# Altium PCB PCB1.PcbDoc
Units mil, origin at the board's own origin, x right, y up, seen from the top; angles counter-clockwise.
Board outline 2007.87 x 2755.91 mil, 2 copper layers (Top Layer, Bottom Layer); 46 components, 53 nets, 181 pads, 12 vias.
Unrouted connection lines stored in the file: 4.
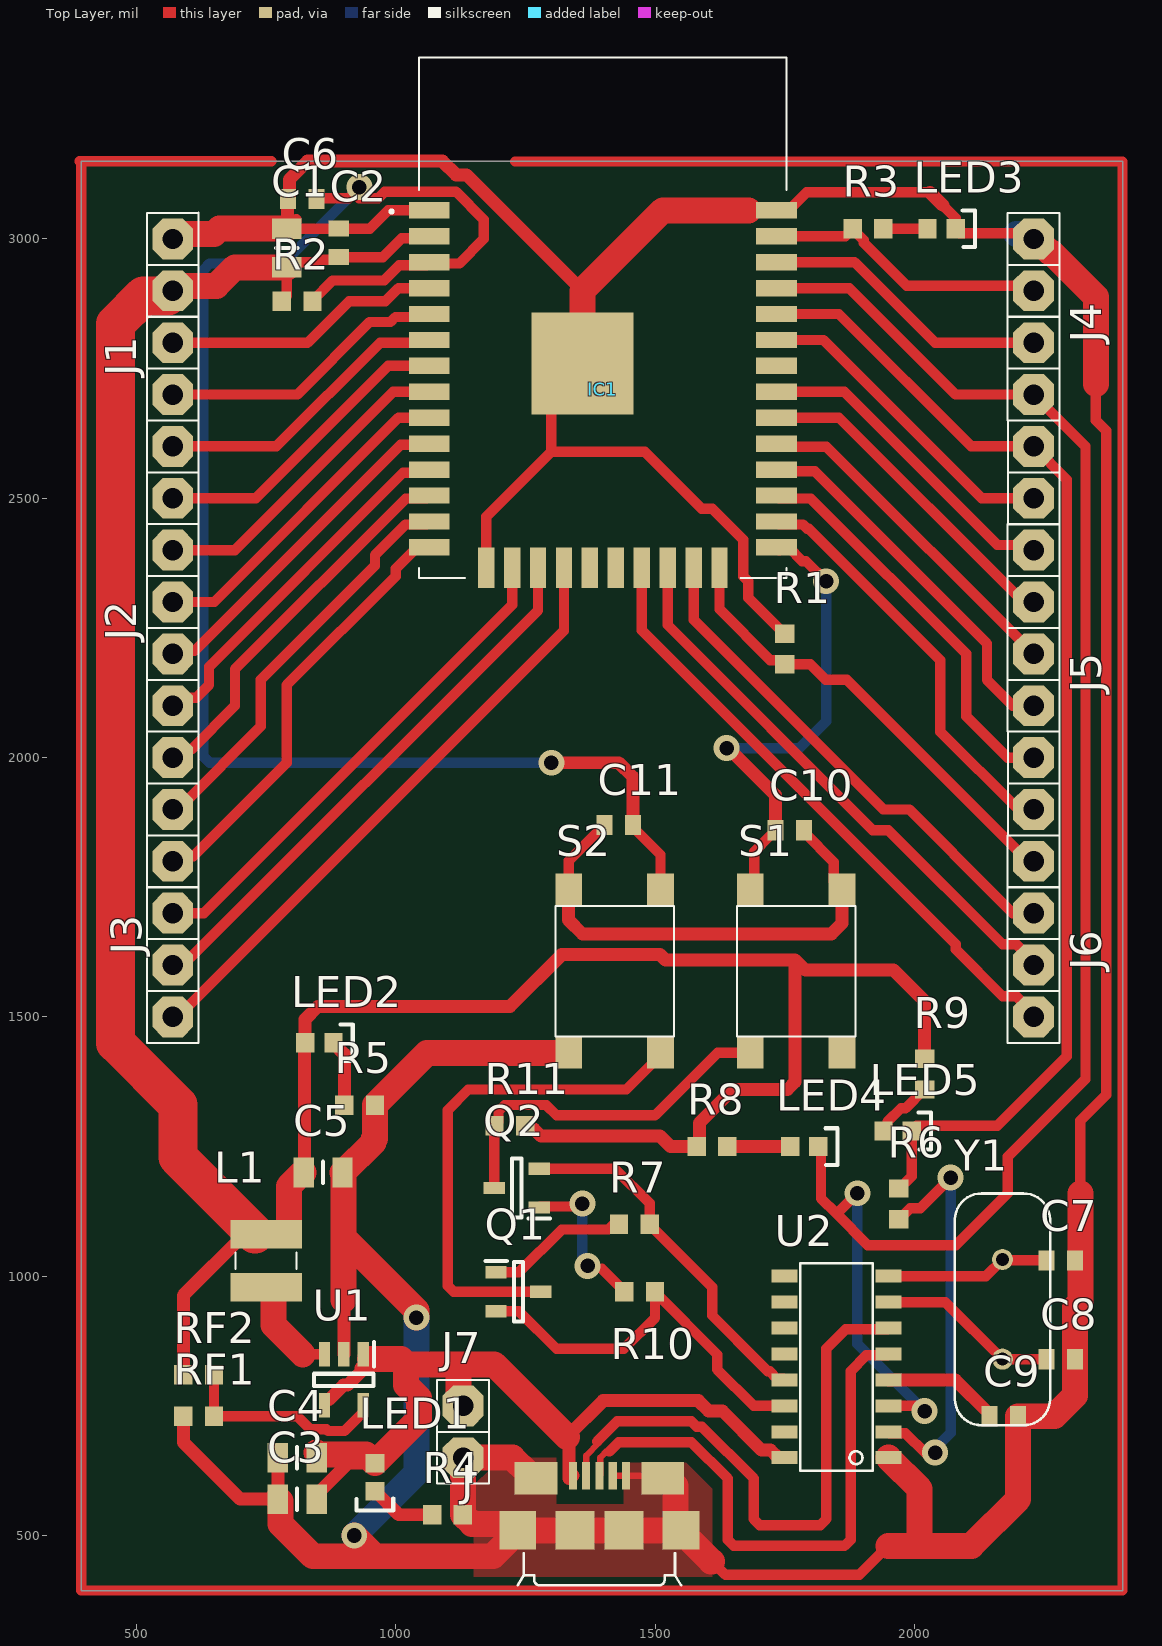
[diagram p0: Top Layer view]
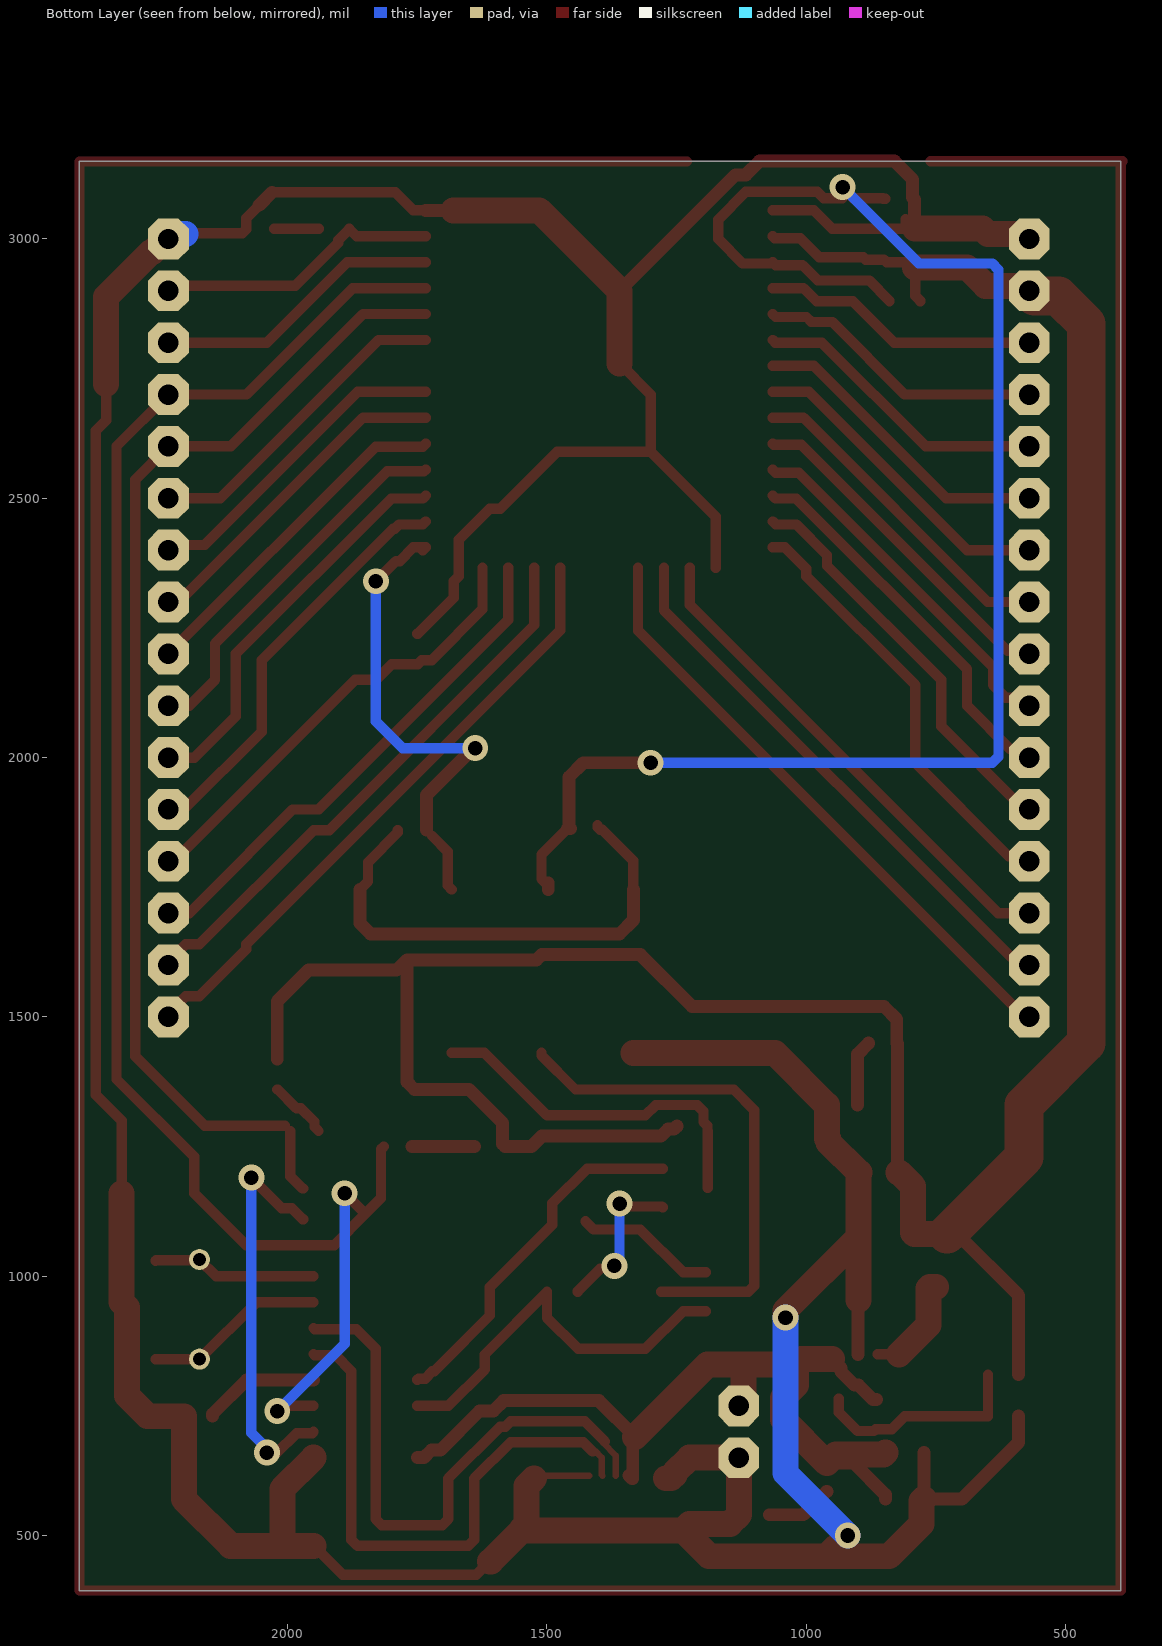
[diagram p1: Bottom Layer view, seen from below]
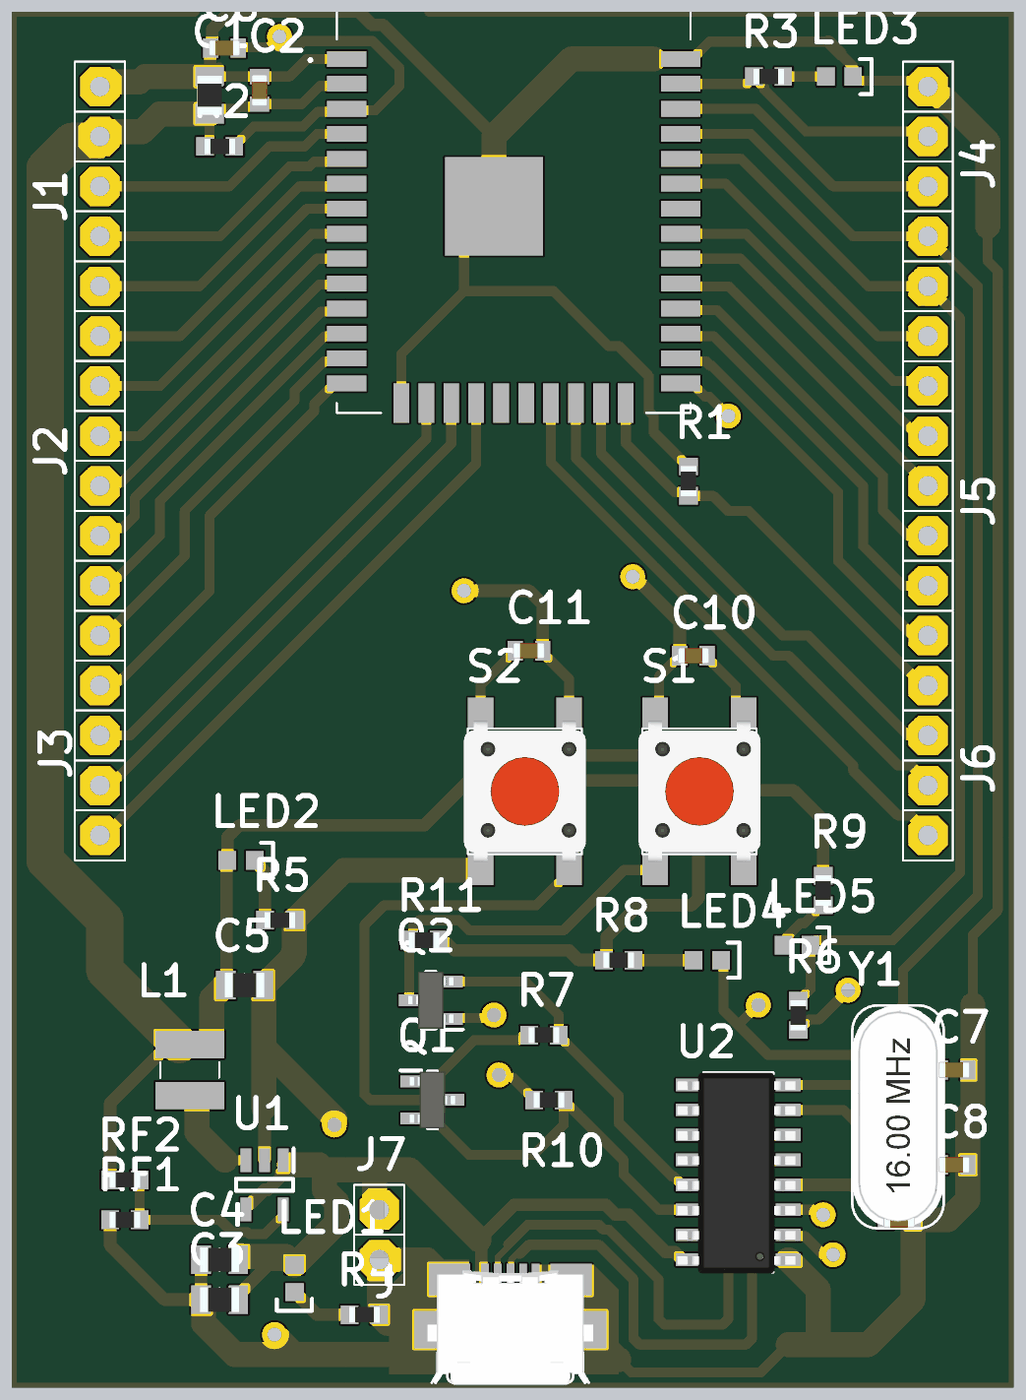
[diagram p2: 3D render of the assembled board from above, using the file's embedded part models]

## Layer stack, top to bottom
Top Solder: solder mask 0.4, Solder Resist, Dk 3.5
Top Layer: signal copper 1.4
Dielectric 1: dielectric 12.6, FR-4, Dk 4.8
Bottom Layer: signal copper 1.4
Bottom Solder: solder mask 0.4, Solder Resist, Dk 3.5

## Board outline
393.7,393.7 393.7,3149.61 2401.57,3149.61 2401.57,393.7

## Design rules (kind name [scope] priority, off if disabled: settings)
AssemblyTestPointUsage [All] p1 off:
AssemblyTestpoint [All] p1 off: testpointundercomponent=TRUE minsize=40 maxsize=100 preferedsize=60 minholesize=0 maxholesize=40 preferedholesize=32 testpointgrid=1 usegrid=TRUE gridtolerance=0.01 allowsidetop=TRUE allowsidebottom=TRUE
Clearance [All] p1: gap=10 ignorepadtopadclearanceinfootprint=FALSE except(0: Arc-Hole Track-Hole SMDPad-Hole THPad-Hole Via-Hole Fill-Hole Poly-Hole Region-Hole Text-Hole)
ComponentClearance [All] p1 off: gap=10 collisioncheckmode=3 verticalgap=10 showdistances=FALSE
DiffPairsRouting [All] p1 off: maxlimit=10 minlimit=10 mostfreqgap=10 toplayer_minwidth=15 toplayer_maxwidth=15 toplayer_prefwidth=15 bottomlayer_minwidth=15 bottomlayer_maxwidth=15 bottomlayer_prefwidth=15 maxuncoupledlength=500
FabricationTestPointUsage [All] p1 off: valid=0 allowmultiple=FALSE
FabricationTestpoint [All] p1 off: side=3 testpointundercomponent=TRUE minsize=40 maxsize=100 preferedsize=60 minholesize=0 maxholesize=40 preferedholesize=32 testpointgrid=1 allowsidetop=TRUE allowsidebottom=TRUE usegrid=TRUE gridtolerance=0.01
FanoutControl Fanout_BGA [IsBGA] p1 off: bgadir=Out bgaviamode=Centered fanoutstyle=Auto fanoutdirection=Alternating viagrid=1 // Fanout_BGA (Default Rule)
FanoutControl Fanout_LCC [IsLCC] p2 off: bgadir=Out bgaviamode=Centered fanoutstyle=Auto fanoutdirection=Alternating viagrid=1 // Fanout_LCC (Default Rule)
FanoutControl Fanout_SOIC [IsSOIC] p3 off: bgadir=Out bgaviamode=Centered fanoutstyle=Auto fanoutdirection=Alternating viagrid=1 // Fanout_SOIC (Default Rule)
FanoutControl Fanout_Small [(CompPinCount < 5)] p4 off: bgadir=Out bgaviamode=Centered fanoutstyle=Auto fanoutdirection=OutThenIn viagrid=1 // Fanout_Small (Default Rule)
FanoutControl Fanout_Default [All] p5 off: bgadir=Out bgaviamode=Centered fanoutstyle=Auto fanoutdirection=Alternating viagrid=1 // Fanout_Default (Default Rule)
Height [All] p1 off: minheight=0 maxheight=1000 prefheight=500
HoleSize [All] p1 off: absolutevalues=TRUE maxlimit=100 minlimit=1 maxpercent=80.000 minpercent=20.000
HoleToHoleClearance [All] p1 off: gap=10 allowstackedmicrovias=TRUE
LayerPairs [All] p1 off: enforce=TRUE
MinimumSolderMaskSliver [All] p1 off: minsoldermaskwidth=10
NetAntennae [All] p1 off: netantennaetolerance=0
PasteMaskExpansion [All] p1 off: expansion=0
PlaneClearance [All] p1 off: clearance=20
PlaneConnect [All] p1 off: planeconnectstyle=Relief reliefexpansion=20 reliefentries=4 reliefconductorwidth=10 reliefairgap=10
PolygonConnect [All] p1 off: connectstyle=Relief reliefconductorwidth=10 reliefentries=4 polygonreliefangle="90 Angle" airgapwidth=10
RoutingCorners [All] p1 off: cornerstyle=45-Degree minsetback=100 maxsetback=100
RoutingLayers [All] p1 off: top layer_v5=TRUE bottom layer_v5=TRUE
RoutingPriority [All] p1 off: routingpriority=0
RoutingTopology [All] p1 off: topology=Shortest
RoutingVias [All] p1 off: holewidth=28 width=50 viastyle="Through Hole" minholewidth=28 minwidth=50 maxholewidth=28 maxwidth=50
ShortCircuit [All] p1 off: allowed=FALSE
SilkToSilkClearance [All] p1 off: silktosilkclearance=10
SilkToSolderMaskClearance [IsPad] p1 off: minsilkscreentomaskgap=10 clearancetoexposedcopper=TRUE
SolderMaskExpansion [All] p1 off: expansion=4 istentingtop=FALSE
UnRoutedNet [All] p1 off:
UnpouredPolygon [All] p1 off:
Width [All] p1 off: maxlimit=10 minlimit=10 preferedwidth=10
1 further rules are at their usual default settings.

## Classes and differential pairs
differential pair USB: +USB_P -USB_N

## Components (designator, comment, footprint, x,y, rotation, side; value= is the part's Value field where it differs from the comment)
C1 "1uF" "0805 Capacitor" 790,2982.6 r90 top
C2 "0.1uF" "0603 Capacitor" 890,2992.44 r270 top
C3 "4.7uF" "0805 Capacitor" 810,570 r0 top
C4 "4.7uF" "0805 Capacitor" 810,650 r0 top
C5 "10uF" "0805 Capacitor" 860,1200 r180 top
C6 "1uF" "0603 Capacitor" 819.76,3077.32 r180 top
C7 "22pF" "0603 Capacitor" 2282.44,1030 r0 top
C8 "22pF" "0603 Capacitor" 2282.44,840 r180 top
C9 "0.1uF" "0603 Capacitor" 2172.44,730 r0 top
C10 "0.1uF" "0603 Capacitor" 1760,1860 r0 top
C11 "0.1uF" "0603 Capacitor" 1430,1870 r0 top
IC1 "ESP32" ESP32 1399.37,2848.19 r0 top
J "MicroUSB" MicroUSB 1392.76,510 r0 top
J1 "JumperHDR6" JumperHDR6 570,2500 r90 top
J2 "JumperHDR6" JumperHDR6 570,1900 r90 top
J3 "JumperHDR4" JumperHDR4 570,1500 r90 top
J4 "JumperHDR6" JumperHDR6 2230,3000 r270 top
J5 "JumperHDR6" JumperHDR6 2230,2400 r270 top
J6 "JumperHDR4" JumperHDR4 2230,1800 r270 top
J7 "JumperHDR_ALT" JumperHDR 1130,650 r90 top
L1 "2.2uH" INDUCTOR_3x3.5 750,1030 r90 top
LED1 "5V_OK" "0603 LED" 960,610 r90 top
LED2 "3V3_OK" "0603 LED" 855,1450 r180 top
LED3 "USER" "0603 LED" 2055,3020 r180 top
LED4 "TX" "0603 LED" 1790,1250 r180 top
LED5 "RX" "0603 LED" 1970,1280 r180 top
Q1 "BC817-25" BC817 1236.69,970 r0 top
Q2 "BC817-25" BC817 1233.31,1170 r180 top
R1 "4.7K" "0603 Resistor" 1750,2209.53 r90 top
R2 "10K" "0603 Resistor" 810,2880 r180 top
R3 "0.47K" "0603 Resistor" 1910.47,3020 r180 top
R4 "1K" "0603 Resistor" 1100,540 r0 top
R5 "1K" "0603 Resistor" 930.47,1330 r0 top
R6 "0.47K" "0603 Resistor" 1970,1139.53 r90 top
R7 "10K" "0603 Resistor" 1460,1100 r180 top
R8 "0.47K" "0603 Resistor" 1610,1250 r180 top
R9 "0.47K" "0603 Resistor" 2020,1389.53 r90 top
R10 "10K" "0603 Resistor" 1470.47,970 r180 top
R11 "4.7K" "0603 Resistor" 1220,1290 r180 top
RF1 "2.2K" "0603 Resistor" 620,730 r0 top
RF2 "10K" "0603 Resistor" 620,810 r180 top
S1 "PGM" "TACT SWITCH SMD" 1770,1590 r270 top
S2 "RESET" "TACT SWITCH SMD" 1420,1590 r270 top
U1 "AP3417BK-ADJTRG1" "SOT BUCK" 900,800 r270 top
U2 "CH340" ch340g-SOIC16 1850,800 r180 top
Y1 "HC49 Crystal" Crystal-HC49 2170,936.06 r90 top value=12MHz

## Footprints (in the part's own frame and the unit in brackets; to place one, negate y for a bottom-side part, rotate by r counter-clockwise, add the part's x,y. Pads: shape width x height; smd on the part's side, far side on the other; paste and mask are expansions set on the pad)
"0603 Capacitor" [mm]
  rect 0.78x0.99 smd: 1(-0.7,0) 2(0.7,0)
  body extent -0.8,-0.41 0.8,0.41, height 0.9
"0603 LED" [mm]
  rect 0.9x0.95 smd: 1(-0.635,0) 2(0.75,0)
  silkscreen extent -1.58,-0.9 -0.97,0.9
"0603 Resistor" [mm]
  rect 0.9x0.95 smd: 1(-0.75,0) 2(0.75,0)
  body extent -0.77,-0.4 0.77,0.4, height 0.55
"0805 Capacitor" [mm]
  rect 1x1.45 smd: 1(-0.95,0) 2(0.95,0)
  silkscreen extent 0,-0.53 0,0.53, body extent -1,-0.63 1,0.63, height 0.65
BC817 [mm]
  rect 1.05x0.6 smd: 1(-1.1,0.95) 2(-1.1,-0.95) 3(1.1,0)
  silkscreen extent -1.63,-1.45 0.23,1.5, body extent -1.15,-1.45 1.15,1.45, height 1.1
ch340g-SOIC16 [mil]
  rect 50x25 smd: 1(-100,150) 2(-100,100) 3(-100,50) 4(-100,0) 5(-100,-50) 6(-100,-100) 7(-100,-150) 8(-100,-200) 9(100,-200) 10(100,-150) 11(100,-100) 12(100,-50) 13(100,0) 14(100,50) 15(100,100) 16(100,150)
  silkscreen extent -70,-225 70,175, body extent -114,-224 122,177, height 67
Crystal-HC49 [mm]
  round 1.03 hole 0.63: 1(-2.44,0) 2(2.44,0)
  silkscreen extent -5.68,-2.33 5.68,2.33, body extent -5.67,-2.33 5.67,2.32, height 1.49
ESP32 [mm]
  rect 2x0.8 smd: 1(-8.5,5.26) 2(-8.5,3.99) 3(-8.5,2.72) 4(-8.5,1.45) 5(-8.5,0.18) 6(-8.5,-1.09) 7(-8.5,-2.36) 8(-8.5,-3.63) 9(-8.5,-4.9) 10(-8.5,-6.17) 11(-8.5,-7.44) 12(-8.5,-8.71) 13(-8.5,-9.98) 14(-8.5,-11.25) 25(8.5,-11.25) 26(8.5,-9.98) 27(8.5,-8.71) 28(8.5,-7.44) 29(8.5,-6.17) 30(8.5,-4.9) 31(8.5,-3.63) 32(8.5,-2.36) 33(8.5,-1.09) 34(8.5,0.18) 35(8.5,1.45) 36(8.5,2.72) 37(8.5,3.99) 38(8.5,5.26)
  rect 0.8x2 smd: 15(-5.715,-12.25) 16(-4.445,-12.25) 17(-3.175,-12.25) 18(-1.905,-12.25) 19(-0.635,-12.25) 20(0.635,-12.25) 21(1.905,-12.25) 22(3.175,-12.25) 23(4.445,-12.25) 24(5.715,-12.25)
  rect 5x5 smd: 39(-1,-2.24)
  silkscreen extent -10.4,-12.75 9,12.75, body extent -9,-12.75 9,12.75, height 3.1
INDUCTOR_3x3.5 [mm]
  rect 1.4x3.5 smd: 1(-1.3,0) 2(1.3,0)
  silkscreen extent -0.4,-1.5 0.4,1.5
JumperHDR [mm]
  oct 2x2 hole 1: 1(0,0) 2(2.54,0)
  silkscreen extent -1.27,-1.27 3.81,1.27
JumperHDR4 [mm]
  oct 2x2 hole 1: 1(0,0) 2(2.54,0) 3(5.08,0) 4(7.62,0)
  silkscreen extent -1.27,-1.27 8.89,1.27
JumperHDR6 [mm]
  oct 2x2 hole 1: 1(0,0) 2(2.54,0) 3(5.08,0) 4(7.62,0) 5(10.16,0) 6(12.7,0)
  silkscreen extent -1.27,-1.27 13.99,1.27
MicroUSB [mm]
  rect 0.4x1.35 smd: 1(-1.3,2.675) 2(-0.65,2.675) 3(0,2.675) 4(0.65,2.675) 5(1.3,2.675)
  rect 1.8x1.9 smd: 5(-4,0) 5(4,0)
  rect 2.1x1.6 smd: 5(-3.1,2.55) 5(3.1,2.55)
  rect 1.9x1.9 smd: 5(-1.2,0) 5(1.2,0)
  silkscreen extent -4,-2.7 4,-1.13, body extent -4.32,-2.8 4.33,3.1, height 2.76
"SOT BUCK" [mm]
  rect 1.2x0.55 smd: 1(-1.25,0.95) 2(-1.25,0) 3(-1.25,-0.95) 4(1.25,-0.95) 5(1.25,0.95)
  silkscreen extent -1.85,-1.46 0.3,1.48, body extent -1.41,-1.46 1.41,1.46, height 1.45
"TACT SWITCH SMD" [mm]
  rect 1.55x1.3 smd: 1(-3.95,2.3) 1(4.05,2.3) 2(-3.95,-2.2) 2(4.05,-2.2)
  silkscreen extent -3.15,-2.85 3.25,2.95, body extent -3.9,-3.05 4,3.15, height 7

## Part data
C1 C3 C4 C5: library part "0805 Capacitor", "Capacitor", Manufacturer_Name=TDK, Manufacturer_Part_Number=C3216C0G1H682J060AA, Mouser Part Number=810-C3216C0G1H682J-1, Datasheet Link=https://product.tdk.com/info/en/catalog/datasheets/mlcc_commercial_midvoltage_en.pdf, Height=0.75mm, Mouser Price/Stock=https://www.mouser.com/Search/Refine.aspx?Keyword=810-C3216C0G1H682J-1
C2 C6 C7 C8 C9 C10 C11: library part "0603 Capacitor", "Capacitor", Arrow Part Number=06031A120JAT2A, Manufacturer_Name=AVX, Mouser Part Number=581-06031A120J, Arrow Price/Stock=https://www.arrow.com/en/products/06031a120jat2a/avx, Datasheet Link=http://www.mouser.com/catalog/supplier/library/pdf/AVXSurfaceMountCeramic.pdf, Height=0.9mm, Manufacturer_Part_Number=06031A120JAT2A, Mouser Price/Stock=https://www.mouser.co.uk/ProductDetail/AVX/06031A120JAT2A?qs=tMrmimOZp5UsY%252BxF6dNGxQ%3D%3D
IC1: "Integrated Circuit", Manufacturer_Name="Espressif Systems", Manufacturer_Part_Number=ESP-WROOM-32D, Mouser Part Number=356-ESP-WROOM-32D, Datasheet Link=https://componentsearchengine.com/Datasheets/1/ESP-WROOM-32D.pdf, Height=3.2mm, Mouser Price/Stock=https://www.mouser.co.uk/ProductDetail/Espressif-Systems/ESP-WROOM-32D?qs=MLItCLRbWsyWVKgdQMcFuQ%3D%3D
J U2: Package=None, Availability=Unavailable, Price=None
  J: MF=Hirose, MP=ZX62-B-5PA, SnapEDA_Link=https://www.snapeda.com/parts/ZX62-B-5PA/Hirose%20Electric%20Co%20Ltd/view-part/134668/?ref=snap
  U2: MF=Eaton, MP=CH340, SnapEDA_Link=https://www.snapeda.com/parts/CH340/Eaton/view-part/4701946/?ref=snap
L1: library part INDUCTOR_3x3.5, "Inductor", Manufacturer_Name="Shuo Xing", Manufacturer_Part_Number=CD32-4R7M, Datasheet Link=http://aitendo3.sakura.ne.jp/aitendo_data/product_img/parts/coil/CD32/CD32.pdf, Height=2.4mm
LED1 LED2 LED3 LED4 LED5: library part "0603 LED", "LED", Manufacturer_Name="Wurth Elektronik", Manufacturer_Part_Number=150060GS55040, Mouser Part Number=710-150060GS55040, Datasheet Link=https://katalog.we-online.de/led/datasheet/150060GS55040.pdf, Height=0.5mm, Mouser Price/Stock=https://www.mouser.com/Search/Refine.aspx?Keyword=710-150060GS55040
Q1 Q2: "Transistor BJT NPN", Manufacturer_Name=Nexperia, Mouser Part Number=N/A, Datasheet Link=https://assets.nexperia.com/documents/data-sheet/BC817_BC817W_BC337.pdf, Height=1.1mm, Manufacturer_Part_Number=BC817-25, Mouser Price/Stock=https://www.mouser.com/Search/Refine.aspx?Keyword=N%2FA
R1 R2 R3 R4 R5 R6 R7 R8 R9 R10 R11 RF1 RF2: library part "0603 Resistor", "Resistor", Arrow Part Number=CPF0603B100RE1, Manufacturer_Name="TE Connectivity", Mouser Part Number=279-CPF0603B100RE1, Arrow Price/Stock=https://www.arrow.com/en/products/cpf0603b100re1/te-connectivity, Datasheet Link=http://www.farnell.com/datasheets/1786775.pdf, Height=0.55mm, Manufacturer_Part_Number=CPF0603B100RE1, Mouser Price/Stock=https://www.mouser.co.uk/ProductDetail/TE-Connectivity-Neohm/CPF0603B100RE1?qs=DfH2yQaBz6s2KWheq2AlNw%3D%3D
S1 S2: library part "TACT SWITCH SMD", Package=None, Availability=Unavailable, MF=Omron, MP=B3F-1000, Price=None, SnapEDA_Link=https://www.snapeda.com/parts/B3F-1000/Omron%20Electronics%20Inc-EMC%20Div/view-part/48569/?ref=snap
U1: "Power Supply", Manufacturer_Name="Diodes Inc.", Mouser Part Number=621-AP3417BK-ADJTRG1, Arrow Part Number=AP3417BK-ADJTRG1, Arrow Price/Stock=https://www.arrow.com/en/products/ap3417bk-adjtrg1/diodes-incorporated, Datasheet Link=https://www.diodes.com/assets/Datasheets/AP3417B.pdf, Height=1.45mm, Manufacturer_Part_Number=AP3417BK-ADJTRG1, Mouser Price/Stock=https://www.mouser.com/Search/Refine.aspx?Keyword=621-AP3417BK-ADJTRG1
Y1: Package="HC-49/US ECS International", Digi-Key_Part_Number=X1115-ND, Digi-Key_Purchase_URL=https://www.digikey.in/product-detail/en/ecs-inc/ECS-80-18-4XDN/X1115-ND/827606?utm_source=snapeda&utm_medium=aggregator&utm_campaign=symbol, MF="ECS Inc.", MP=ECS-80-18-4XDN, SnapEDA_Link=https://www.snapeda.com/parts/ECS-80-18-4XDN/ECS%20Inc./view-part/49558/?ref=snap

## Via types
v1: diameter 50, hole 28, Top Layer to Bottom Layer, 12 vias

## Nets (pads, with @x,y where several pads share a name; then routed paths per layer and width w, separated by ;. In a path a pad name is that pad's centre, name@x,y a point inside that pad or via, vN(x,y) a via of type N, cw(c..) or ccw(c..) an arc to the next point about the centre after c; other vN are vias at no path point)
3V3: C1.1 C2.2 C5.2 IC1.2 J1.5 L1.2 LED2.2 R2.2 R8.2 R9.2 R11.1 RF2.2 | length 5684.4
  Top Layer w20: 690,2945.2 700,2945.2 ; R2.2 780.47,2880.98 790,2890.51 C1.1 799.69,2954.88 844.88,2954.88 850,2960 885.12,2960 C2.2 974.88,2964.88 1011.23,3001.23 1060.68,3001.23 IC1.2
  Top Layer w25: RF2.2 590.47,962.99 708.66,1081.18 728.54,1081.18 L1.2 ; C5.2 824.04,1201.44 824.04,1448.56 LED2.2 825.47,1495.47 850,1520 1220,1520 1320,1620 1510,1620 1520,1610 1770,1610 ; R11.1 1249.53,1289.02 1254.74,1283.8 1266.2,1283.8 1280,1270 1510,1270 1529.53,1250.47 R8.2@1580,1250.47 ; R8.2 1585.69,1255.22 1585.69,1295.69 1650,1360 1755.36,1360 1770,1374.64 1770,1610 ; R9.2 2020,1530 1960,1590 1790,1590 1770,1610
  Top Layer w50: J1.5 579.33,2909.33 654.13,2909.33 690,2945.2 ; 700,2945.2 C1.1 ; L1.2 791.34,1081.18 793.9,1083.74 793.9,1173.07 820.83,1200 C5.2
  Top Layer w75: J1.5 560,2890 513.77,2890 460,2836.23 460,1450 579.97,1330.03 579.97,1229.75 L1.2@728.54,1081.18
CLK: IC1.20
CMD: IC1.19
EN: C6.1 C11.2 IC1.3 Q1.3 R2.1 S2.1 | length 4166.1
  Top Layer w20: R2.1 839.53,2880.98 878.54,2920 977.57,2920 1007.1,2949.53 1058.98,2949.53 IC1.3 1067.36,2952.64 1122.64,2952.64 1170,3000 1170,3037.32 1116.3,3091.02 978.6,3091.02 966.24,3078.66 v1@930,3078.66 ; C6.1 851.34,3077.32 852.68,3078.66 909.46,3078.66 930,3099.21 v1(930,3100) ; Q1.3 1111.72,970 1100,981.72 1100,1320 1140,1360 1444.92,1360 1510.55,1425.63 S2.1@1510.55,1430.55 ; C11.2 1457.56,1865.87 1460.41,1863.01 1510.55,1812.87 1510.55,1766.02 1503.13,1758.6 S2.1@1497.46,1758.6
  Top Layer w25: v1(1300,1990) 1430,1990 1457.56,1962.44 C11.2 ; C11.2@1454.7,1863.01 C11.2@1460.41,1863.01 ; S2.1@1497.46,1745.51 S2.1@1497.46,1758.6
  Bottom Layer w20: v1(930,3100) 782.78,2952.78 641.09,2952.78 629.37,2941.07 629.37,2827.97 629.37,2001.72 641.09,1990 v1(1300,1990)
GND: C1.2 C2.1 C3.1 C4.1 C5.1 C6.2 C7.2 C8.1 C9.2 C10.2 C11.1 IC1.1 IC1.15 IC1.38 IC1.39 J1.6 J4.1 J7.1 J.4 J.5 LED3.1 R1.2 R4.2 R5.2 RF1.1 S1.1 S2.2 U1.2 U2.1 | length 11681.1
  Top Layer w12: J.4 1443.94,615.32 1519.72,615.32 J.5@1524.65,610.39
  Top Layer w20: J1.6@550,3000 J1.6 ; C1.2 C1.2@798.86,3020 ; C1.2@808.54,3038.54 808.54,3029.69 C1.2@798.86,3020 ; IC1.1 985.28,3055.28 950,3020 C2.1 C1.2@798.86,3020 ; IC1.15 1174.37,2464.37 1300,2590 ; S2.2@1333.39,1745.51 1333.39,1800.94 1392.95,1860.51 1397.09,1860.51 1402.44,1865.87 C11.1 ; IC1.39 1300,2700 1300,2590 ; 1610,450 1635.86,424.14 1894.14,424.14 1950,480 ; IC1.38 1757.64,3055.28 1792.36,3090 2030,3090 ; R1.2 1749.02,2239.06 1680,2308.07 1680,2340 1670,2350 1670,2420 1610,2480 1590,2480 1480,2590 1300,2590 ; C10.2 1787.56,1855.87 1844.96,1798.46 1844.96,1761.1 S1.1@1860.55,1745.51 ; 2055,3065 2080,3040 LED3.1 2080,3019.02 2087.72,3011.3 2238.7,3011.3 J4.1@2250,3000 ; 2320,1160 2320,1300 2370,1350 2370,2630 2350,2650 2350,2720
  Top Layer w25: RF1.1 590.47,679.53 700,570 C3.1 C4.1 C4.1@772.6,660 ; C1.2 791.1,3021.1 791.1,3076.22 C6.2 795.06,3080.18 795.06,3115.06 830,3150 1090,3150 1116.48,3123.52 1136.48,3123.52 1360,2900 ; 891.51,946.82 900,938.33 U1.2 ; S2.2@1333.39,1745.51 1333.39,1686.61 1360,1660 1840,1660 1860.55,1680.55 S1.1@1860.55,1745.51 ; 1680,3055.28 IC1.38 ; 2030,3090 2055,3065
  Top Layer w50: J1.6 579.33,3009.33 649.33,3009.33 660,3020 C1.2 ; C3.1 774.37,570 777.91,566.46 777.91,522.09 840,460 960,460 ; C5.1 899.17,1200 957.28,1258.11 957.28,1263.2 960,1265.91 R5.2 1060,1430 1332.83,1430 S2.2@1333.39,1430.55 ; 898.91,954.22 898.91,1075.34 ; C5.1@898.91,1196.46 898.91,1075.34 ; v1(920,500) 960,460 ; v1(1040,920) 1040,934.25 898.91,1075.34 ; J.5@1270.71,610.39 1260.87,610.39 1254.37,616.89 1254.37,620.71 1225.08,650 J7.1 1130,540.47 R4.2 1147.13,522.4 1224.84,522.4 1235.28,511.97 J.5@1235.28,510 ; IC1.39 1360,2900 1515.28,3055.28 1680,3055.28 ; J.5@1524.65,610.39 1539.8,595.24 1539.8,520.43 J.5@1550.24,510 ; 1610,450 1608.27,450 1550.24,508.03 J.5@1550.24,510 ; 1950,480 2010,480 ; U2.1 2010,590 2010,480 ; J4.1 2235.04,3000 2260.67,2974.37 2264.18,2974.37 2350,2888.55 2350,2720 ; 2320,1160 2320,1030 2320,950 2310,940 C8.1 2310,770 2270,730 C9.2 2200,570 2110,480 2010,480 ; 960,460 1187.24,460 1235.28,508.03 J.5@1235.28,510 ; J.5@1235.28,510 1345.51,510 1440,510 J.5@1550.24,510
  Bottom Layer w50: v1(920,500) 1040,620 v1(1040,920) ; J4.1@2196.97,3009.33 2220.67,3009.33 J4.1
IO0: C10.1 IC1.25 Q2.3 R11.2 S1.2 | length 1632
  Top Layer w20: Q2.3 1190.24,1170.24 1190.24,1279.76 1190.47,1280 R11.2 1198.19,1297.72 1198.19,1318.19 1210,1330 1290,1330 1310,1310 1500,1310 1620.55,1430.55 S1.2@1683.39,1430.55 ; S1.2@1683.39,1745.51 1691.22,1753.35 1691.22,1818.78 C10.1@1721.22,1848.78 ; IC1.25@1739.29,2400 IC1.25 1757.64,2405.28 1784.02,2378.89 1791.11,2378.89 v1(1830,2340)
  Top Layer w25: v1(1638.18,2018.18) 1641.82,2018.18 1732.44,1927.56 C10.1
  Bottom Layer w20: v1(1638.18,2018.18) 1778.18,2018.18 1830,2070 v1(1830,2340)
IO2: IC1.24 J6.1 R1.1 | length 906.1
  Top Layer w20: IC1.24 1624.37,2285.63 1722.28,2187.72 1741.3,2187.72 R1.1@1749.02,2180 ; R1.1 1799.53,2180 1829.53,2150 1870,2150 2204.46,1815.54 2234.46,1815.54 J6.1@2250,1800
IO4: IC1.26 J5.6 | length 826.6
  Top Layer w20: IC1.26 1739.76,2449.53 1784.78,2449.53 1793.29,2441.02 1796.55,2441.02 2050,2187.57 2050,2050 2200,1900 J5.6@2250,1900
IO5: IC1.29 J5.3 | length 663.9
  Top Layer w20: IC1.29 1739.76,2599.53 1830.47,2599.53 J5.3
IO12: IC1.14 J3.4 | length 827.5
  Top Layer w20: J3.4@580,1810 610,1810 790,1990 790,2140 1000,2350 1000,2364.17 1041.1,2405.28 IC1.14
IO13: IC1.16 J3.3 | length 992.1
  Top Layer w20: J3.3@550,1700 630,1700 1224.37,2294.37 IC1.16
IO14: IC1.13 J2.1 | length 809.2
  Top Layer w20: J2.1@550,1900 560,1910 590,1910 740,2060 740,2150 960,2370 960,2390 1019.53,2449.53 1058.98,2449.53 IC1.13
IO15: IC1.23 J6.2 | length 1010.2
  Top Layer w20: IC1.23 1574.37,2265.63 1940,1900 1990,1900 2160,1730 2190,1700 J6.2@2250,1700
IO16: IC1.27 J5.5 | length 795.6
  Top Layer w20: IC1.27 1739.76,2499.53 1800.47,2499.53 2100,2200 2100,2080 2180,2000 J5.5@2250,2000
IO17: IC1.28 J5.4 | length 745.6
  Top Layer w20: IC1.28 1737.43,2551.86 1808.14,2551.86 2140,2220 2140,2150 2180.03,2109.97 2190,2100 J5.4@2250,2100
IO18: IC1.30 J5.2 | length 663.1
  Top Layer w20: IC1.30 1854.72,2655.28 2199.26,2310.74 2239.26,2310.74 J5.2@2250,2300
IO19: IC1.31 J5.1 | length 628.3
  Top Layer w20: IC1.31 1864.72,2705.28 2160,2410 J5.1@2240,2410
IO21: IC1.33 J4.6 | length 642.4
  Top Layer w20: IC1.33 1824.72,2805.28 2130,2500 J4.6@2250,2500
IO22: IC1.36 J4.3 | length 580.3
  Top Layer w20: IC1.36 1884.72,2955.28 2040,2800 J4.3@2250,2800
IO23: IC1.37 J4.2 R3.2 | length 550.5
  Top Layer w20: IC1.37 1867.2,3005.28 R3.2@1880.94,3019.02 ; R3.2 R3.2@1880.94,3019.02 ; J4.2@2230,2910 1985.3,2910 1902.28,2993.01 1902.28,2997.68 R3.2@1880.94,3019.02
IO25: IC1.10 J2.4 | length 682.6
  Top Layer w20: J2.4@550,2200 555.98,2205.98 612.02,2205.98 1009.25,2603.21 1062.66,2603.21 IC1.10
IO26: IC1.11 J2.3 | length 724.1
  Top Layer w20: J2.3@550,2100 565.54,2115.54 615.54,2115.54 640,2140 640,2175.49 1014.04,2549.53 1058.98,2549.53 IC1.11
IO27: IC1.12 J2.2 | length 765
  Top Layer w20: J2.2@550,2000 565.54,2015.54 605.54,2015.54 690,2100 690,2170 1019.53,2499.53 1058.98,2499.53 IC1.12
IO32: IC1.8 J2.6 | length 641.2
  Top Layer w20: J2.6@550,2400 690,2400 995.28,2705.28 IC1.8
IO33: IC1.9 J2.5 | length 661.9
  Top Layer w20: J2.5@550,2300 650,2300 1005.28,2655.28 IC1.9
IO34: IC1.6 J1.2 | length 599.8
  Top Layer w20: J1.2@550,2600 770,2600 970,2800 1059.45,2800 IC1.6
IO35: IC1.7 J1.1 | length 620.5
  Top Layer w20: J1.1@550,2500 730,2500 985.28,2755.28 IC1.7
MCURX: IC1.34 J4.5 LED5.1 R6.2 | length 2270.7
  Top Layer w20: IC1.34 1854.72,2855.28 2110,2600 J4.5 2294.14,2535.86 2294.14,1424.14 2160,1290 LED5.1@2005,1290 ; R6.2 1970.98,1169.06 1995,1193.07 LED5.1
MCUTX: IC1.35 J4.4 LED4.1 U2.3 | length 3369.9
  Top Layer w20: IC1.35 1874.72,2905.28 2080,2700 J4.4 2330,2600 2330,1380 2180,1230 2180,1160 2080,1060 1910,1060 1850,1120 ; LED4.1 1820,1245 1820,1150 1850,1120 ; v1(1890,1160) 1850,1120 ; U2.3 2001.88,750 2011.88,740 v1(2020,740)
  Bottom Layer w20: v1(1890,1160) 1890,870 v1(2020,740)
NetC7_1: C7.1 U2.8 Y1.2 | length 319.1
  Top Layer w20: U2.8 2137.87,1000 Y1.2 2171.06,1031.06 2253.82,1031.06 C7.1
NetC8_2: C8.2 U2.7 Y1.1 | length 350.4
  Top Layer w20: U2.7 2060,950 Y1.1 C8.2
NetC9_1: C9.1 U2.4 | length 226.3
  Top Layer w25: U2.4 2079.02,800 2144.88,734.13 C9.1
NetL1_1: L1.1 U1.3 | length 207.7
  Top Layer w20: 820.79,849.21 U1.3
  Top Layer w50: L1.1 761.89,978.82 764.45,976.26 764.45,905.55 820.79,849.21
NetLED1_1: LED1.1 R4.1 | length 129.1
  Top Layer w25: LED1.1 960.98,585 1005.98,540 R4.1
NetLED2_1: LED2.1 R5.1 | length 128.7
  Top Layer w25: LED2.1 880,1449.02 900.94,1428.07 R5.1
NetLED3_2: LED3.2 R3.1 | length 85.5
  Top Layer w20: R3.1 LED3.2
NetLED4_2: LED4.2 R8.1 | length 120.9
  Top Layer w25: R8.1 LED4.2
NetLED5_2: LED5.2 R9.1 | length 118.6
  Top Layer w20: LED5.2 1948.19,1287.72 1948.19,1297.89 1974.3,1324 1983.01,1324 2019.02,1360 R9.1
NetQ1_1: Q1.1 R7.2 | length 273.1
  Top Layer w20: Q1.1 1237.4,1007.4 1320,1090 1410,1090 R7.2@1425.73,1105.73
NetQ1_2: Q1.2 R10.1 U2.14 | length 769.3
  Top Layer w20: Q1.2 1237.4,932.6 1310,860 1440,860 1500,920 R10.1@1500,969.02 ; R10.1 R10.1@1500,969.02 ; U2.14 1690,750 1620,820 1620,849.02 R10.1@1500,969.02
NetQ2_1: Q2.1 R10.2 | length 272.8
  Top Layer w20: Q2.1 1278.43,1134.41 1354.41,1134.41 v1(1360,1140) ; 1397.67,1014.26 1440.94,970.98 R10.2
  Bottom Layer w20: v1(1360,1140) 1360,1038.12 1370,1028.12 v1(1370,1020)
NetQ2_2: Q2.2 R7.1 U2.13 | length 698.2
  Top Layer w20: Q2.2 1422.6,1207.4 1489.53,1140.47 R7.1 1489.53,1099.02 1610,978.54 1610,924.22 1705,829.22 1717.57,816.64 1720.86,816.64 1735,802.5 1747.5,802.5 U2.13
NetR6_1: R6.1 U2.2 | length 783.6
  Top Layer w20: U2.2 1952.5,697.5 1982.5,697.5 2021.72,658.28 2038.28,658.28 v1(2040,660) ; R6.1 1970.98,1110 1992.32,1131.34 2011.34,1131.34 v1(2070,1190)
  Bottom Layer w20: v1(2040,660) 2040,668.12 2070,698.12 v1(2070,1190)
NetRF1_2: RF1.2 RF2.1 U1.5 | length 420.4
  Top Layer w20: RF2.1 RF1.2 810,730 835,705 866.04,705 869.58,701.46 900.87,701.46 937.4,737.99 U1.5 U1.5@937.4,763.58
SD0: IC1.21 J6.4 | length 1210.6
  Top Layer w20: IC1.21 1474.37,2245.63 2079.98,1640.02 2079.98,1630.02 2170,1540 2196.17,1540 2236.17,1500 J6.4@2250,1500
SD1: IC1.22 J6.3 | length 1107.5
  Top Layer w20: IC1.22 1524.37,2255.63 1920,1860 1950,1860 2170,1640 2196.17,1640 2236.17,1600 J6.3@2250,1600
SD2: IC1.17 J3.2 | length 1089.4
  Top Layer w20: J3.2@550,1600 565.54,1615.54 605.54,1615.54 1274.37,2284.37 IC1.17
SD3: IC1.18 J3.1 | length 1184.2
  Top Layer w20: J3.1 580,1500 1324.37,2244.37 IC1.18
SENSOR_VN: IC1.5 J1.3 | length 579
  Top Layer w20: J1.3@550,2700 810,2700 950,2840 990,2840 999.53,2849.53 1058.98,2849.53 IC1.5
SENSOR_VP: IC1.4 J1.4 | length 518.3
  Top Layer w20: J1.4@590,2800 830,2800 910,2880 980,2880 1005.28,2905.28 IC1.4
USB_N: J.2 U2.6 | length 1129
  Top Layer w12: J.2 1367.17,654.14 1391.51,678.49
  Top Layer w20: 1388.69,681.31 1427.37,720 1570,720 1580,710 1590,710 1690,610 1690,531.72 1701.72,520 1818.28,520 1830,531.72 1830,860 1867.5,897.5 1947.5,897.5 U2.6
USB_P: J.3 U2.5 | length 1095.3
  Top Layer w12: J.3 1394.47,617.03 1394.47,650.33 1407.07,662.93
  Top Layer w20: 1411.69,661.89 1429.8,680 1570,680 1640,610 1640,491.72 1651.72,480 1865.36,480 1877.07,491.72 1877.07,817.07 1907.5,847.5 1947.5,847.5 U2.5
VUSB: C3.2 C4.2 J7.2 J.1 LED1.2 U1.1 U1.4 U2.16 | length 1737.5
  Top Layer w25: C3.2 847.4,578.86 908.07,639.53 LED1.2 ; U1.4@864.27,761.91 871.33,761.91 899.42,790 907.06,790 933.33,816.27 933.33,823.33 950,840 ; J.1 1336.26,610 1334.55,610 1334.55,685.45 1330,690 1400,760 1583.46,760 1603.46,740 1630,740 1705,665 1722.5,665 1737.5,650 U2.16
  Top Layer w50: C4.2@847.4,660 850.95,656.46 908.07,656.46 943.07,656.46 LED1.2 1044.53,724.05 1044.53,765.47 1020,790 1020,830 ; 950,840 1010,840 1020,830 ; J7.2 1120.67,759.33 1120.67,829.33 1120,830 ; 1330,690 1190,830 1120,830 ; 1020,830 1120,830
pads on no net: IC1.32 U2.9 U2.10 U2.11 U2.12 U2.15
copper on no net: | length 9060.9
  Top Layer w19.68: 390,3150 760,3150 ; 393.7,3149.61 393.7,393.7 2401.57,393.7 2401.57,3149.61 1230.39,3149.61

## Polygon pours and split planes (outlines as drawn)
GND on Top Layer "GND_L01_P000" (solid, pour order 0): 1310,650 1160,650 1150,640 1150,420 1610,420 1610,590 1560,640 1440,640 1440,560 1310,560

## Silkscreen, mask and mechanical layers (free items; w line width, h text height)
Bottom Paste:
  drawing of 9 lines, arcs and shapes, not listed
  text "GND" at 640,2970 h60
  text "GND" at 2000,2970 h60
  text "3V3" at 640,2870 h60
  text "23" at 2040,2870 h60
  text "ESPress Yourself" at 990,2861.33 h120
  text "S_VP" at 640,2780 h60
  text "22" at 2040,2770 h60
  text "ESP32 Board" at 1060,2721.33 h120
  text "S_VN" at 640,2680 h60
  text "TX" at 2040,2670 h60
  text "10/10/2021" at 1120,2571.33 h120
  text "34" at 640,2570 h60
  text "RX" at 2040,2570 h60
  text "35" at 640,2470 h60
  text "21" at 2040,2470 h60
  text "ugurkrcl" at 1210,2442.55 h120
  text "32" at 640,2370 h60
  text "19" at 2040,2370 h60
  text "33" at 640,2270 h60
  text "18" at 2040,2270 h60
  text "25" at 640,2170 h60
  text "5" at 2040,2170 h60
  text "26" at 640,2070 h60
  text "17" at 2040,2070 h60
  text "27" at 640,1970 h60
  text "16" at 2040,1970 h60
  text "14" at 640,1870 h60
  text "4" at 2040,1870 h60
  text "12" at 640,1770 h60
  text "2" at 2040,1770 h60
  text "13" at 640,1670 h60
  text "15" at 2040,1670 h60
  text "SD2" at 640,1570 h60
  text "SD1" at 2000,1570 h60
  text "SD3" at 640,1470 h60
  text "SD0" at 2000,1470 h60